# Altium PCB Cando.PcbDoc
Units mm, origin at the board's own origin, x right, y up, seen from the top; angles counter-clockwise.
Board outline 40 x 16 mm, 2 copper layers (Top Layer, Bottom Layer); 25 components, 19 nets, 118 pads, 76 vias.
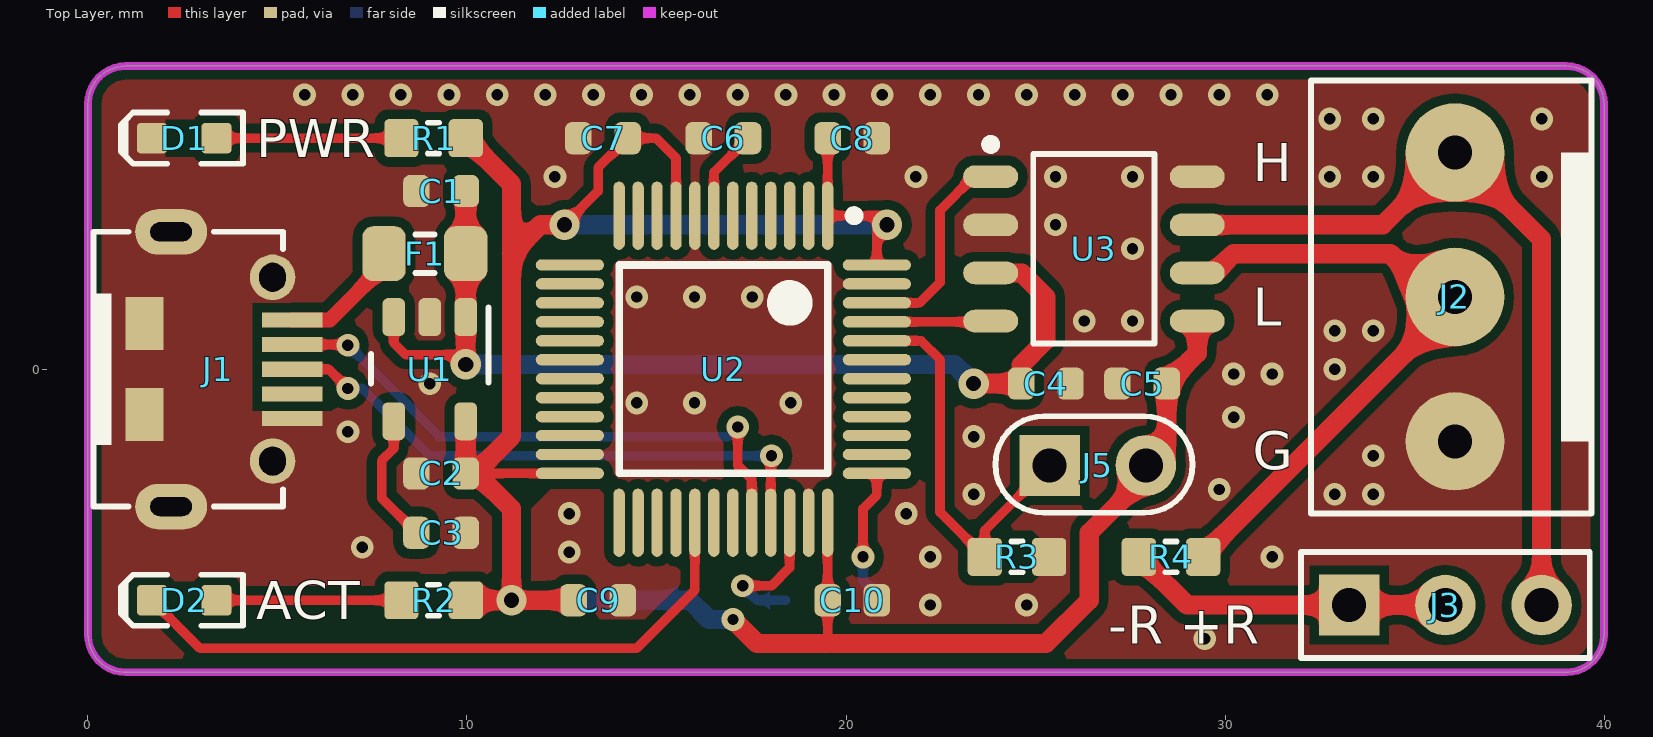
[diagram p0: Top Layer view]
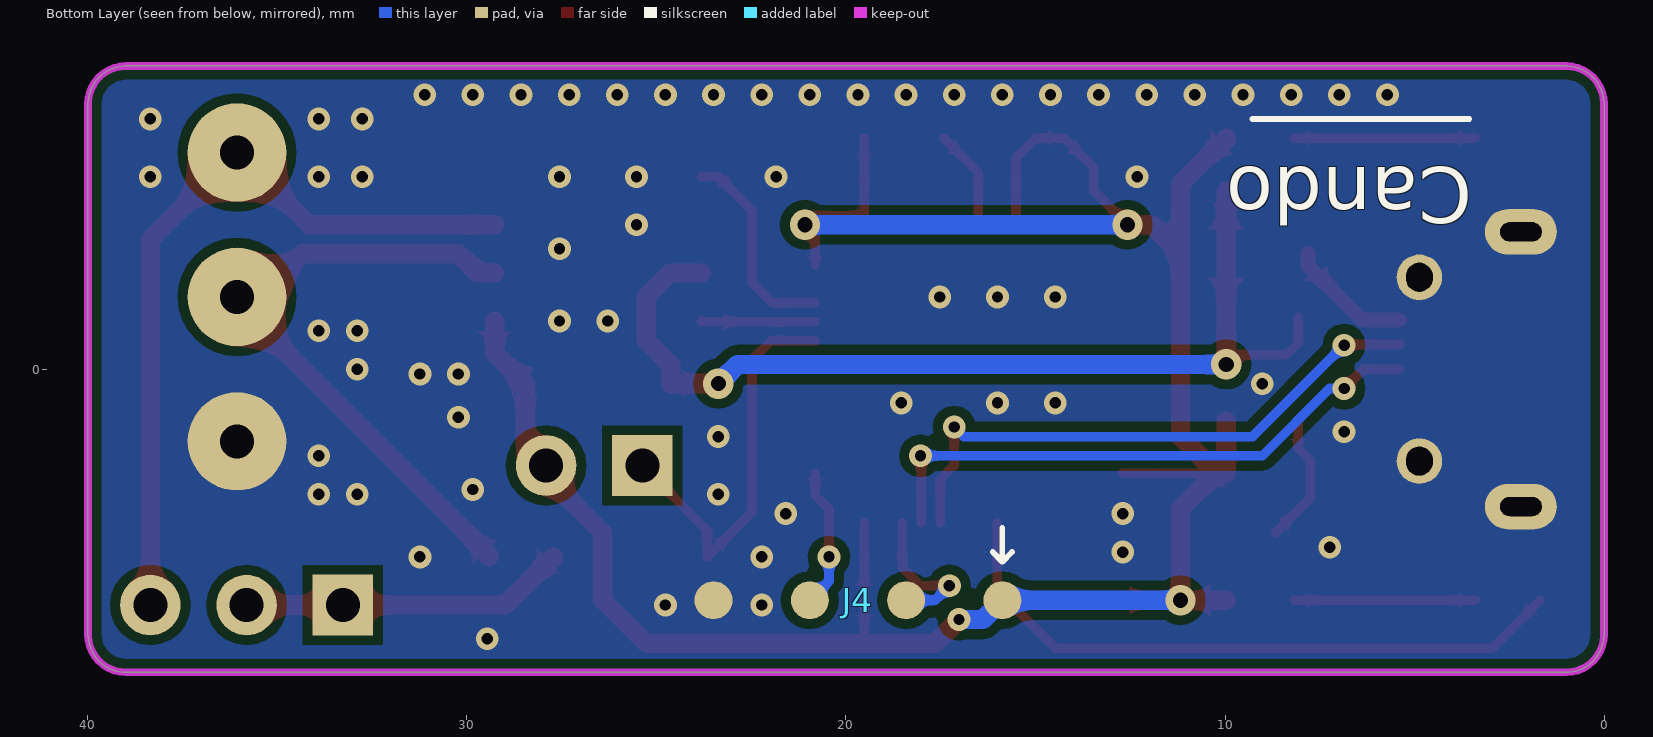
[diagram p1: Bottom Layer view, seen from below]
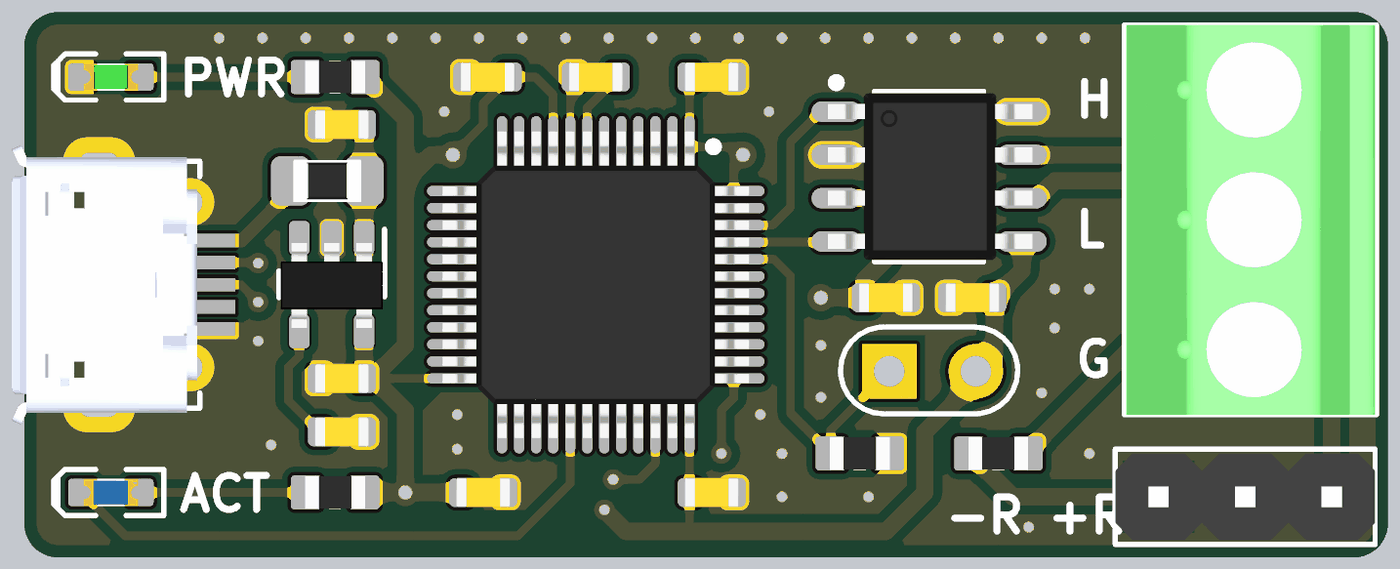
[diagram p2: 3D render of the assembled board from above, using the file's embedded part models]

## Layer stack, top to bottom
Top Solder: solder mask 0.0102, Solder Resist, Dk 3.5
Top Layer: signal copper 0.0356
Dielectric 1: dielectric 0.32, FR-4, Dk 4.8
Bottom Layer: signal copper 0.0356
Bottom Solder: solder mask 0.0102, Solder Resist, Dk 3.5

## Board outline
1,-8 cw(c1,-7) 0,-7 0,7 cw(c1,7) 1,8 39,8 cw(c39,7) 40,7 40,-7 cw(c39,-7) 39,-8

## Design rules (kind name [scope] priority, off if disabled: settings)
Clearance Clearance_10 [InNamedPolygon('Bottom')] p1: gap=0.254 ignorepadtopadclearanceinfootprint=FALSE except(0: Arc-Hole Track-Hole SMDPad-Hole THPad-Hole Via-Hole Fill-Hole Poly-Hole Region-Hole Text-Hole)
Clearance Clearance_9 [InNamedPolygon('Bottom')] p2: gap=0.254 ignorepadtopadclearanceinfootprint=FALSE except(0: Arc-Hole Track-Hole SMDPad-Hole THPad-Hole Via-Hole Fill-Hole Poly-Hole Region-Hole Text-Hole)
Clearance Clearance_8 [InNamedPolygon('GND_L02_P006')] p3: gap=0.254 ignorepadtopadclearanceinfootprint=FALSE except(0: Arc-Hole Track-Hole SMDPad-Hole THPad-Hole Via-Hole Fill-Hole Poly-Hole Region-Hole Text-Hole)
Clearance Clearance_7 [InNamedPolygon('Top')] p4: gap=0.254 ignorepadtopadclearanceinfootprint=FALSE except(0: Arc-Hole Track-Hole SMDPad-Hole THPad-Hole Via-Hole Fill-Hole Poly-Hole Region-Hole Text-Hole)
Clearance Clearance_6 [InNamedPolygon('Bootom')] p5: gap=0.254 ignorepadtopadclearanceinfootprint=FALSE except(0: Arc-Hole Track-Hole SMDPad-Hole THPad-Hole Via-Hole Fill-Hole Poly-Hole Region-Hole Text-Hole)
Clearance Clearance_5 [InNamedPolygon('Bootom')] p6: gap=2.54 ignorepadtopadclearanceinfootprint=FALSE except(0: Arc-Hole Track-Hole SMDPad-Hole THPad-Hole Via-Hole Fill-Hole Poly-Hole Region-Hole Text-Hole)
Clearance Clearance_4 [InNamedPolygon('Bootom')] p7: gap=0.254 ignorepadtopadclearanceinfootprint=FALSE except(0: Arc-Hole Track-Hole SMDPad-Hole THPad-Hole Via-Hole Fill-Hole Poly-Hole Region-Hole Text-Hole)
Clearance Clearance_3 [InNamedPolygon('GND_L01_P000')] p8: gap=0.254 ignorepadtopadclearanceinfootprint=FALSE except(0: Arc-Hole Track-Hole SMDPad-Hole THPad-Hole Via-Hole Fill-Hole Poly-Hole Region-Hole Text-Hole)
Clearance Clearance_2 [InNamedPolygon('Bootom')] p9: gap=0.254 ignorepadtopadclearanceinfootprint=FALSE except(0: Arc-Hole Track-Hole SMDPad-Hole THPad-Hole Via-Hole Fill-Hole Poly-Hole Region-Hole Text-Hole)
Clearance [InNamedPolygon('Bootom')] p10: gap=0.762 ignorepadtopadclearanceinfootprint=FALSE except(0: Arc-Hole Track-Hole SMDPad-Hole THPad-Hole Via-Hole Fill-Hole Poly-Hole Region-Hole Text-Hole)
Clearance Clearance_1 [All] p11: gap=0.127 ignorepadtopadclearanceinfootprint=FALSE except(0: Arc-Hole Track-Hole SMDPad-Hole THPad-Hole Via-Hole Fill-Hole Poly-Hole Region-Hole Text-Hole)
Clearance Polygon [InPolygon] p12: gap=0.254 ignorepadtopadclearanceinfootprint=FALSE except(0: Arc-Hole Track-Hole SMDPad-Hole THPad-Hole Via-Hole Fill-Hole Poly-Hole Region-Hole Text-Hole)
PolygonConnect PolygonConnect_22 [All vs IsNamedPolygon('Top')] p1: connectstyle=Direct reliefconductorwidth=0.254 reliefentries=4 polygonreliefangle="90 Angle" airgapwidth=0.254
PolygonConnect PolygonConnect_21 [All vs IsNamedPolygon('Bottom')] p2: connectstyle=Direct reliefconductorwidth=0.254 reliefentries=4 polygonreliefangle="90 Angle" airgapwidth=0.254
PolygonConnect PolygonConnect_20 [All vs IsNamedPolygon('Top Layer-No Net')] p3: connectstyle=Direct reliefconductorwidth=0.254 reliefentries=4 polygonreliefangle="90 Angle" airgapwidth=0.254
PolygonConnect PolygonConnect_19 [All vs IsNamedPolygon('GND_L02_P006')] p4: connectstyle=Direct reliefconductorwidth=0.254 reliefentries=4 polygonreliefangle="90 Angle" airgapwidth=0.254
PolygonConnect PolygonConnect_18 [All vs IsNamedPolygon('GND_L02_P006')] p5: connectstyle=Direct reliefconductorwidth=0.254 reliefentries=4 polygonreliefangle="90 Angle" airgapwidth=0.254
PolygonConnect PolygonConnect_17 [All vs IsNamedPolygon('GND_L02_P006')] p6: connectstyle=Direct reliefconductorwidth=0.254 reliefentries=4 polygonreliefangle="90 Angle" airgapwidth=0.254
PolygonConnect PolygonConnect_16 [All vs IsNamedPolygon('GND_L02_P006')] p7: connectstyle=Direct reliefconductorwidth=0.254 reliefentries=4 polygonreliefangle="90 Angle" airgapwidth=0.254
PolygonConnect PolygonConnect_15 [All vs IsNamedPolygon('Bootom')] p8: connectstyle=Direct reliefconductorwidth=0.254 reliefentries=4 polygonreliefangle="90 Angle" airgapwidth=0.254
PolygonConnect PolygonConnect_14 [All vs IsNamedPolygon('Bootom')] p9: connectstyle=Relief reliefconductorwidth=0.254 reliefentries=4 polygonreliefangle="90 Angle" airgapwidth=0.254
PolygonConnect PolygonConnect_13 [All vs IsNamedPolygon('Bootom')] p10: connectstyle=Relief reliefconductorwidth=0.254 reliefentries=4 polygonreliefangle="90 Angle" airgapwidth=2.54
PolygonConnect PolygonConnect_12 [All vs IsNamedPolygon('Bootom')] p11: connectstyle=Direct reliefconductorwidth=0.254 reliefentries=4 polygonreliefangle="90 Angle" airgapwidth=0.254
PolygonConnect PolygonConnect_11 [All vs IsNamedPolygon('NONET_L02_P012')] p12: connectstyle=Direct reliefconductorwidth=0.254 reliefentries=4 polygonreliefangle="90 Angle" airgapwidth=0.254
PolygonConnect PolygonConnect_10 [All vs IsNamedPolygon('NONET_L02_P012')] p13: connectstyle=Direct reliefconductorwidth=0.254 reliefentries=4 polygonreliefangle="90 Angle" airgapwidth=0.254
PolygonConnect PolygonConnect_9 [All vs IsNamedPolygon('Top')] p14: connectstyle=Direct reliefconductorwidth=0.254 reliefentries=4 polygonreliefangle="90 Angle" airgapwidth=0.254
PolygonConnect PolygonConnect_8 [All vs IsNamedPolygon('GND_L02_P006')] p15: connectstyle=Direct reliefconductorwidth=0.254 reliefentries=4 polygonreliefangle="90 Angle" airgapwidth=0.254
PolygonConnect PolygonConnect_7 [All vs IsNamedPolygon('GND_L02_P006')] p16: connectstyle=Direct reliefconductorwidth=0.254 reliefentries=4 polygonreliefangle="90 Angle" airgapwidth=0.254
PolygonConnect PolygonConnect_6 [All vs IsNamedPolygon('GND_L02_P006')] p17: connectstyle=Direct reliefconductorwidth=0.254 reliefentries=4 polygonreliefangle="90 Angle" airgapwidth=0.254
PolygonConnect PolygonConnect_5 [All vs IsNamedPolygon('GND_L02_P004')] p18: connectstyle=Direct reliefconductorwidth=0.254 reliefentries=4 polygonreliefangle="90 Angle" airgapwidth=0.254
PolygonConnect PolygonConnect_4 [All vs IsNamedPolygon('GND_L02_P004')] p19: connectstyle=Direct reliefconductorwidth=0.254 reliefentries=4 polygonreliefangle="90 Angle" airgapwidth=0.254
PolygonConnect PolygonConnect_3 [All vs IsNamedPolygon('GND_L02_P004')] p20: connectstyle=Direct reliefconductorwidth=0.254 reliefentries=4 polygonreliefangle="90 Angle" airgapwidth=0.254
PolygonConnect PolygonConnect_2 [All vs IsNamedPolygon('GND_L02_P004')] p21: connectstyle=Direct reliefconductorwidth=0.254 reliefentries=4 polygonreliefangle="90 Angle" airgapwidth=0.254
PolygonConnect PolygonConnect_1 [All vs IsNamedPolygon('GND_L02_P004')] p22: connectstyle=Direct reliefconductorwidth=0.254 reliefentries=4 polygonreliefangle="90 Angle" airgapwidth=0.254
PolygonConnect [All] p23: connectstyle=Relief reliefconductorwidth=0.254 reliefentries=4 polygonreliefangle="90 Angle" airgapwidth=0.254
RoutingVias [All] p1: holewidth=0.711 width=1.27 viastyle="Through Hole" minholewidth=0.2 minwidth=0.1 maxholewidth=2 maxwidth=10
SolderMaskExpansion [All] p1: expansion=0.102 istentingtop=FALSE
Width [All] p1: maxlimit=6 minlimit=0.1 preferedwidth=0.254
30 further rules are at their usual default settings.

## Components (designator, comment, footprint, x,y, rotation, side; value= is the part's Value field where it differs from the comment)
C1 "4.7μF" CAP_0603 9.317,4.699 r0 top
C2 "4.7μF" CAP_0603 9.317,-2.75 r0 top
C3 "22nF" CAP_0603 9.317,-4.318 r180 top
C4 "100nF" CAP_0603 25.273,-0.381 r180 top
C5 "100nF" CAP_0603 27.813,-0.381 r0 top
C6 "100nF" CAP_0603 16.764,6.096 r0 top
C7 "100nF" CAP_0603 13.589,6.096 r0 top
C8 "100nF" CAP_0603 20.164,6.096 r180 top
C9 "100nF" CAP_0603 13.462,-6.096 r180 top
C10 "100nF" CAP_0603 20.164,-6.096 r180 top
D1 "green" LED_GREEN_0603 2.54,6.096 r180 top
D2 "blue" LED_BLUE_0603 2.54,-6.096 r180 top
F1 "PTC_0805" RES_0805 8.888,3.048 r0 top
J1 "MicroUSB-B" MICRO-USB-B 3.492,0 r0 top
J2 "WJ124-3.81-3P" WJ124-3.81-3P 36.068,1.905 r0 top
J3 "Header_2.54_3P" HEADER-2.54-3P 35.814,-6.223 r90 top
J4 "SWD" SWD-2.54-4P 19.685,-6.096 r270 bottom
J5 "BOOT_2.54_2P" BOOT_2.54_2P 26.643,-2.54 r90 top
R1 "10K" RES_0603 9.117,6.096 r0 top
R2 "10K" RES_0603 9.117,-6.096 r0 top
R3 "10K" RES_0603 24.511,-4.953 r0 top
R4 "120R" RES_0603 28.575,-4.953 r0 top
U1 "RT9193-33GB" SOT23-5 9.017,0 r270 top
U2 "STM32F072C8T6" STM-LQFP48_N 16.764,0 r270 top
U3 "TJA1051T/3" SOIC-8 26.543,3.175 r0 top

## Footprints (in the part's own frame and the unit in brackets; to place one, negate y for a bottom-side part, rotate by r counter-clockwise, add the part's x,y. Pads: shape width x height; smd on the part's side, far side on the other; paste and mask are expansions set on the pad)
BOOT_2.54_2P [mm]
  rect 1.6x1.6 hole 0.9: 1(0,1.27)
  round 1.6 hole 0.9: 2(0,-1.27)
  silkscreen extent -1.25,-2.5 1.3,2.7
CAP_0603 [mm]
  rrect50% 0.7x0.85 smd: 1(-0.65,0) 2(0.65,0)
  body extent -0.8,-0.43 0.8,0.43, height 0.8
HEADER-2.54-3P [mm]
  rect 1.6x1.6 hole 0.9: 1(0,2.54)
  round 1.6 hole 0.9: 2(0,0) 3(0,-2.54)
  silkscreen extent -1.4,-3.81 1.4,3.81, body extent -1.27,-3.81 1.27,3.81, height 8
LED_BLUE_0603 [mm]
  rrect25% 0.8x0.8 smd: A(-0.85,0) K(0.85,0)
  Top Layer pour cut-out: -0.5,0.5 0.5,0.5 0.5,-0.5 -0.5,-0.5
  silkscreen extent -1.55,-0.67 1.68,0.67, body extent -0.8,-0.4 0.8,0.4, height 0.6
LED_GREEN_0603 [mm]
  rrect25% 0.8x0.8 smd: A(-0.85,0) K(0.85,0)
  Top Layer pour cut-out: -0.5,0.5 0.5,0.5 0.5,-0.5 -0.5,-0.5
  silkscreen extent -1.55,-0.67 1.68,0.67, body extent -0.8,-0.4 0.8,0.4, height 0.6
MICRO-USB-B [mm]
  rect 1.6x0.4 smd: 1(1.9,1.3) 2(1.9,0.65) 3(1.9,0) 4(1.9,-0.65) 5(1.9,-1.3)
  rect 1x1.4 smd: 6(-2,-1.2) 6(-2,1.2)
  oval 1.9x1.2 hole 0.5 slot 1.1 at 0 deg: 6(-1.3,-3.625) 6(-1.3,3.625)
  round 1.2 hole 0.7 slot 0.762 at 90 deg: 6(1.38,-2.425) 6(1.38,2.425)
  silkscreen extent -3.37,-3.62 1.66,3.63, body extent -3.86,-4.1 1.57,4.1, height 2.72
RES_0603 [mm]
  rrect25% 0.9x1 smd: 1(-0.85,0) 2(0.85,0)
  Top Layer pour cut-out: -0.6,0.5 -0.4,0.7 0.4,0.7 0.6,0.5 0.6,-0.5 0.4,-0.7 -0.4,-0.7 -0.6,-0.5
  silkscreen extent -0.15,-0.41 0.15,0.41, body extent -0.87,-0.47 0.88,0.48, height 0.54
RES_0805 [mm]
  rrect50% 1.143x1.45 smd: 1(-1.079,0) 2(1.079,0)
  silkscreen extent -0.25,-0.51 0.25,0.51, body extent -1,-0.62 1,0.63, height 0.5
SOIC-8 [mm]
  oval 1.45x0.6 smd: 1(-2.725,1.905) 2(-2.725,0.635) 3(-2.725,-0.635) 4(-2.725,-1.905) 5(2.725,-1.905) 6(2.725,-0.635) 7(2.725,0.635) 8(2.725,1.905)
  silkscreen extent -2.85,-2.5 1.6,2.88, body extent -2.97,-2.45 3.03,2.45, height 1.7
SOT23-5 [mm]
  rrect50% 1x0.6 smd paste+0 mask+0.051: 1(-1.375,0.95) 2(-1.375,0) 3(-1.375,-0.95) 4(1.375,-0.95) 5(1.375,0.95)
  silkscreen extent -1.63,-1.55 0.38,1.55, body extent -1.23,-1.5 1.27,1.5, height 1.05
STM-LQFP48_N [mm] "QFP, 48-Leads, Body 7x7mm, Pitch 0.5mm, IPC Medium Density"
  oval 1.8x0.3 smd: 1(-4.05,2.75) 2(-4.05,2.25) 3(-4.05,1.75) 4(-4.05,1.25) 5(-4.05,0.75) 6(-4.05,0.25) 7(-4.05,-0.25) 8(-4.05,-0.75) 9(-4.05,-1.25) 10(-4.05,-1.75) 11(-4.05,-2.25) 12(-4.05,-2.75) 25(4.05,-2.75) 26(4.05,-2.25) 27(4.05,-1.75) 28(4.05,-1.25) 29(4.05,-0.75) 30(4.05,-0.25) 31(4.05,0.25) 32(4.05,0.75) 33(4.05,1.25) 34(4.05,1.75) 35(4.05,2.25) 36(4.05,2.75)
  oval 0.3x1.8 smd: 13(-2.75,-4.05) 14(-2.25,-4.05) 15(-1.75,-4.05) 16(-1.25,-4.05) 17(-0.75,-4.05) 18(-0.25,-4.05) 19(0.25,-4.05) 20(0.75,-4.05) 21(1.25,-4.05) 22(1.75,-4.05) 23(2.25,-4.05) 24(2.75,-4.05) 37(2.75,4.05) 38(2.25,4.05) 39(1.75,4.05) 40(1.25,4.05) 41(0.75,4.05) 42(0.25,4.05) 43(-0.25,4.05) 44(-0.75,4.05) 45(-1.25,4.05) 46(-1.75,4.05) 47(-2.25,4.05) 48(-2.75,4.05)
  silkscreen extent -4.17,-2.75 2.75,3.58, body extent -4.5,-4.5 4.5,4.5, height 1.6
SWD-2.54-4P [mm]
  round 1 smd paste-5: 1(0,3.81) 2(0,1.27) 3(0,-1.27) 4(0,-3.81)
WJ124-3.81-3P [mm]
  round 2.6 hole 0.9: 1(0,3.81) 2(0,0) 3(0,-3.81)
  silkscreen extent -3.8,-5.71 3.6,5.71, body extent -3.74,-5.72 3.56,5.71, height 8.5

## Part data
C1 C2: library part CAP_4.7μF_0603, "Cap 4.7μF 6.3V X5R 0603"
C3: library part CAP_22nF_0603, "Cap 22nF 50V X5R 0603"
C4 C5 C6 C7 C8 C9 C10: library part CAP_100nF_0603, "Cap 100nF 50V X5R 0603"
D1: library part LED_GREEN_0603, "LED green 0603"
D2: library part LED_BLUE_0603, "LED blue 0603"
F1: "PTC 0.5A 0805 C20978"
J1: "MicroUSB-B-SMT C10418"
J2: "WJ124-3.81-3P C36780"
J3: "Header 2.54 3P"
J4: "SWD 2.54 4P"
R1 R2 R3: library part RES_10K_0603, "Res SMD 10K 5% 1/10W 0603"
R4: library part RES_120R_0603, "Res SMD 120R 5% 1/10W 0603"
U1: "Chip RT9193-33GB LDO Regulator C15651"
U2: "Chip STM32F072C8T6 C80488"
U3: "Chip TJA1051T/3 CAN C38695"

## Via types
v1: diameter 0.6, hole 0.3, Top Layer to Bottom Layer, tented both sides, 71 vias
v2: diameter 0.8, hole 0.4, Top Layer to Bottom Layer, tented both sides, 5 vias

## Nets (pads, with @x,y where several pads share a name; then routed paths per layer and width w, separated by ;. In a path a pad name is that pad's centre, name@x,y a point inside that pad or via, vN(x,y) a via of type N, cw(c..) or ccw(c..) an arc to the next point about the centre after c; other vN are vias at no path point)
5V: C1.2 C4.2 F1.2 U1.1 U1.3 U3.3 | length 26.5
  Top Layer w0.254: U1.3 8.067,0.696 8.382,0.381 9.713,0.381 v2(9.967,0.127)
  Top Layer w0.508: v2(9.967,0.127) U1.1 F1.2 C1.2 ; v2(23.368,-0.381) C4.2 24.623,0.112 25.273,0.762 25.273,1.905 24.638,2.54 U3.3
  Bottom Layer w0.508: v2(9.967,0.127) 22.86,0.127 v2(23.368,-0.381)
BOOT0: J5.1 R3.1 U2.44 | length 10.7
  Top Layer w0.254: U2.44 21.983,0.75 22.479,0.254 22.479,-3.771 R3.1 23.661,-4.252 J5.1
CAN_RX: U2.45 U3.4 | length 3
  Top Layer w0.254: U2.45 23.798,1.25 U3.4
CAN_TX: U2.46 U3.1 | length 5.5
  Top Layer w0.254: U2.46 21.943,1.75 22.479,2.286 22.479,4.191 23.368,5.08 U3.1
GND: C1.1 C2.1 C3.1 C4.1 C5.1 C6.1 C7.1 C8.1 C9.1 C10.1 D1.K J1.5 J1.6 J2.3 J4.4 R3.2 U1.2 U2.8 U2.23 U2.35 U2.47 U3.2 U3.8
  other v1: 29.464,-7.112 22.225,-6.223 24.765,-6.223 22.225,-4.953 31.242,-4.953 12.7,-4.826 7.239,-4.699 12.7,-3.81 21.59,-3.81 23.368,-3.302 32.893,-3.302 33.909,-3.302 29.845,-3.175 33.909,-2.286 23.368,-1.778 6.858,-1.651 30.226,-1.27 14.478,-0.889 16.002,-0.889 18.542,-0.889 9.017,-0.381 30.226,-0.127 31.242,-0.127 32.893,0 32.893,1.016 33.909,1.016 26.289,1.27 27.559,1.27 14.478,1.905 16.002,1.905 17.526,1.905 27.559,3.175 25.527,3.81 12.319,5.08 21.844,5.08 25.527,5.08 27.559,5.08 32.766,5.08 33.909,5.08 38.354,5.08 32.766,6.604 33.909,6.604 38.354,6.604 5.715,7.239 6.985,7.239 8.255,7.239 9.525,7.239 10.795,7.239 12.065,7.239 13.335,7.239 14.605,7.239 15.875,7.239 17.145,7.239 18.415,7.239 19.685,7.239 20.955,7.239 22.225,7.239 23.495,7.239 24.765,7.239 26.035,7.239 27.305,7.239 28.575,7.239 29.845,7.239 31.115,7.239
LED_ACT: D2.K U2.29 | length 17.3
  Top Layer w0.254: D2.K 2.96,-7.366 14.478,-7.366 16.014,-5.83 U2.29
NetC3_2: C3.2 U1.4 | length 3.5
  Top Layer w0.254: U1.4 8.067,-2.093 7.747,-2.413 7.747,-3.398 C3.2
NetC6_2: C6.2 U2.7 | length 2.4
  Top Layer w0.254: U2.7 16.514,5.196 C6.2
NetD1_A: D1.A R1.1 | length 4.8
  Top Layer w0.254: D1.A R1.1@8.167,6.096
NetD2_A: D2.A R2.1 | length 4.8
  Top Layer w0.254: D2.A R2.1@8.167,-6.096
NetF1_1: F1.1 J1.1 | length 3.3
  Top Layer w0.4: J1.1 6.38,1.3 7.81,2.73 F1.1
NetJ2_1: J2.1 J3.3 U3.7 | length 20.1
  Top Layer w0.508: U3.7 34.163,3.81 J2.1 38.354,3.429 J3.3@38.354,-5.842
NetJ2_2: J2.2 R4.2 U3.6 | length 17.1
  Top Layer w0.508: U3.6 29.718,2.54 30.226,3.048 34.359,3.048 35.502,1.905 J2.2 36.068,1.74 29.425,-4.903 R4.2
NetJ3_1: J3.1 J3.2 R4.1 | length 8.6
  Top Layer w0.508: R4.1 27.725,-5.003 27.921,-5.199 27.971,-5.199 28.995,-6.223 J3.1 J3.2
SWCLK: J4.3 U2.37 | length 3.7
  Top Layer w0.254: v1(20.447,-4.953) 20.447,-3.683 20.814,-3.316 U2.37
  Bottom Layer w0.254: v1(20.447,-4.953) 20.447,-5.588 J4.3
SWDIO: J4.2 U2.34 | length 3.9
  Top Layer w0.254: v1(17.272,-5.715) 18.034,-5.715 18.514,-5.235 U2.34
  Bottom Layer w0.254: v1(17.272,-5.715) 17.653,-6.096 J4.2
USB_DM: J1.2 U2.32 | length 15.5
  Top Layer w0.254: J1.2 6.843,0.65 v1(6.858,0.635) ; v1(17.145,-1.524) 17.145,-2.54 17.514,-2.909 U2.32
  Bottom Layer w0.254: v1(6.858,0.635) 9.271,-1.778 16.891,-1.778 v1(17.145,-1.524)
USB_DP: J1.3 U2.33 | length 15.4
  Top Layer w0.254: J1.3 6.35,0 v1(6.858,-0.508) ; U2.33 18.014,-2.306 v1(18.034,-2.286)
  Bottom Layer w0.254: v1(6.858,-0.508) 7.239,-0.508 9.017,-2.286 v1(18.034,-2.286)
V3.3: C2.2 C5.2 C7.2 C8.2 C9.2 C10.2 J4.1 J5.2 R1.2 R2.2 U1.5 U2.1 U2.9 U2.24 U2.36 U2.48 U3.5 | length 69.2
  Top Layer w0.254: C2.2 10.204,-2.75 10.243,-2.75 U2.24 ; v2(12.573,3.81) 13.462,4.699 13.462,5.319 C7.2 14.986,6.096 15.514,5.568 U2.9 ; 19.431,-7.239 19.514,-7.156 C10.2 U2.36 ; C8.2 U2.1 20.842,4.05 v2(21.082,3.81) 20.814,3.542 U2.48
  Top Layer w0.508: R2.2 v2(11.176,-6.096) ; C2.2 U1.5 ; R1.2 9.967,6.046 10.163,5.85 10.213,5.85 11.176,4.887 11.176,3.048 ; C2.2@10.204,-2.75 11.176,-1.778 11.176,3.048 ; C2.2@10.243,-2.75 11.176,-3.683 v2(11.176,-6.096) ; v2@12.253,3.81 11.938,3.81 11.176,3.048 ; C9.2 v2(11.176,-6.096) ; v1(17.018,-6.604) 17.653,-7.239 19.431,-7.239 25.273,-7.239 26.416,-6.096 26.416,-4.318 27.913,-2.821 J5.2 28.463,-1.99 C5.2 29.268,0.424 U3.5
  Bottom Layer w0.508: v2(11.176,-6.096) J4.1 16.383,-6.604 v1(17.018,-6.604) ; v2(12.573,3.81) v2(21.082,3.81)
pads on no net: J1.4 U2.2 U2.3 U2.4 U2.5 U2.6 U2.10 U2.11 U2.12 U2.13 U2.14 U2.15 U2.16 U2.17 U2.18 U2.19 U2.20 U2.21 U2.22 U2.25 U2.26 U2.27 U2.28 U2.30 U2.31 U2.38 U2.39 U2.40 U2.41 U2.42 U2.43

## Polygon pours and split planes (outlines as drawn)
GND on Top Layer "Top" (solid, remove dead copper, pour order 9): 1,-8 cw(c1,-7) 0,-7 0,7 cw(c1,7) 1,8 39,8 cw(c39,7) 40,7 40,-7 cw(c39,-7) 39,-8
GND on Bottom Layer "Bottom" (solid, remove dead copper, pour order 10): 1,-8 cw(c1,-7) 0,-7 0,7 cw(c1,7) 1,8 39,8 cw(c39,7) 40,7 40,-7 cw(c39,-7) 39,-8

## Keep-outs
Keep-Out Layer:
  the board outline again, w0.2

## Other copper
Top Layer:
  pour cut-out: 19.304,-4.572 16.764,-4.572 16.764,-6.345 17.404,-6.985 19.304,-6.985
  pour cut-out: 10.033,-7.239 14.859,-7.239 14.859,-6.604 10.033,-6.604
  pour cut-out: 11.176,-1.524 12.446,-1.524 12.446,-2.54 11.176,-2.54
  pour cut-out: 12.329,-3.048 11.567,-3.81 10.922,-3.81 10.922,-3.048
  pour cut-out: 20.955,2.54 22.225,2.54 22.225,1.905 20.955,1.905

## Silkscreen, mask and mechanical layers (free items; w line width, h text height)
Top Overlay:
  text "PWR" at 4.445,5.588 h1
  text "H" at 30.734,4.961 h1
  text "L" at 30.734,1.151 h1
  text "G" at 30.734,-2.659 h1
  text "ACT" at 4.445,-6.604 h1
  text "-R +R" at 26.924,-7.239 h1
Bottom Overlay:
  lines w0.152: 3.556,6.604 9.271,6.604 ; 15.621,-4.826 15.875,-5.08 ; 15.875,-4.191 15.875,-5.08 ; 16.129,-4.826 15.875,-5.08
  text "Cando" at 3.48,5.817 h2.54 r180